# EAGLE board V4-AddOnSduino-V003 (EAGLE 9.3.0)
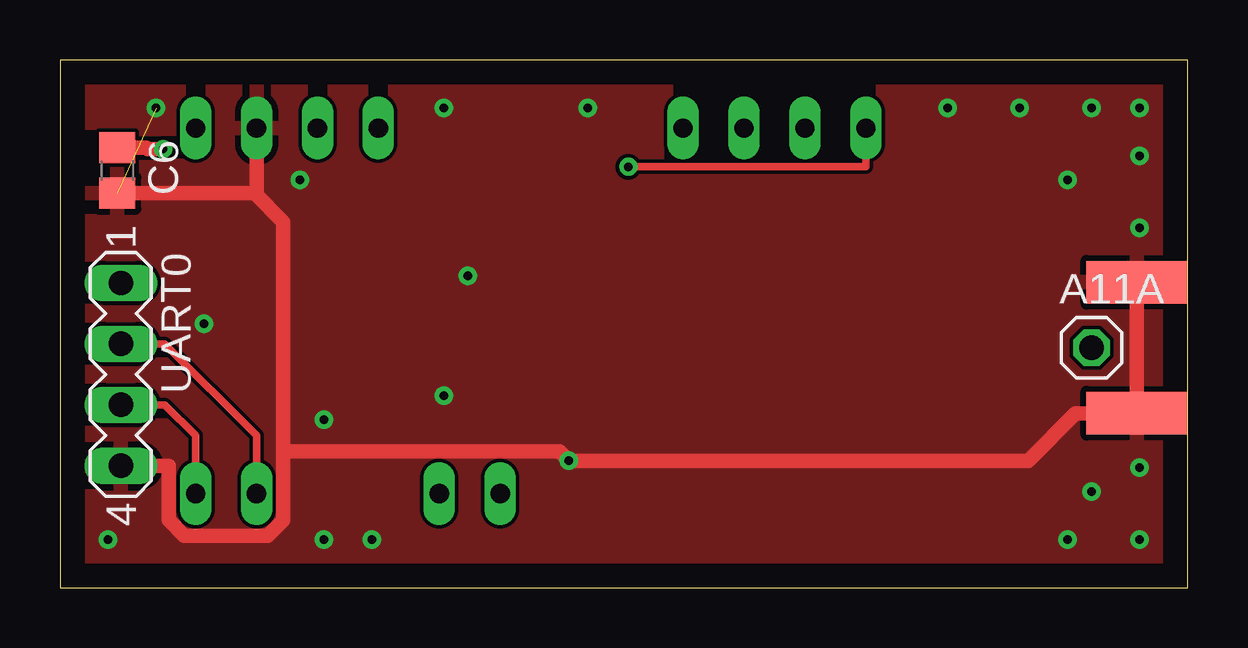
[diagram p0: board, top side]
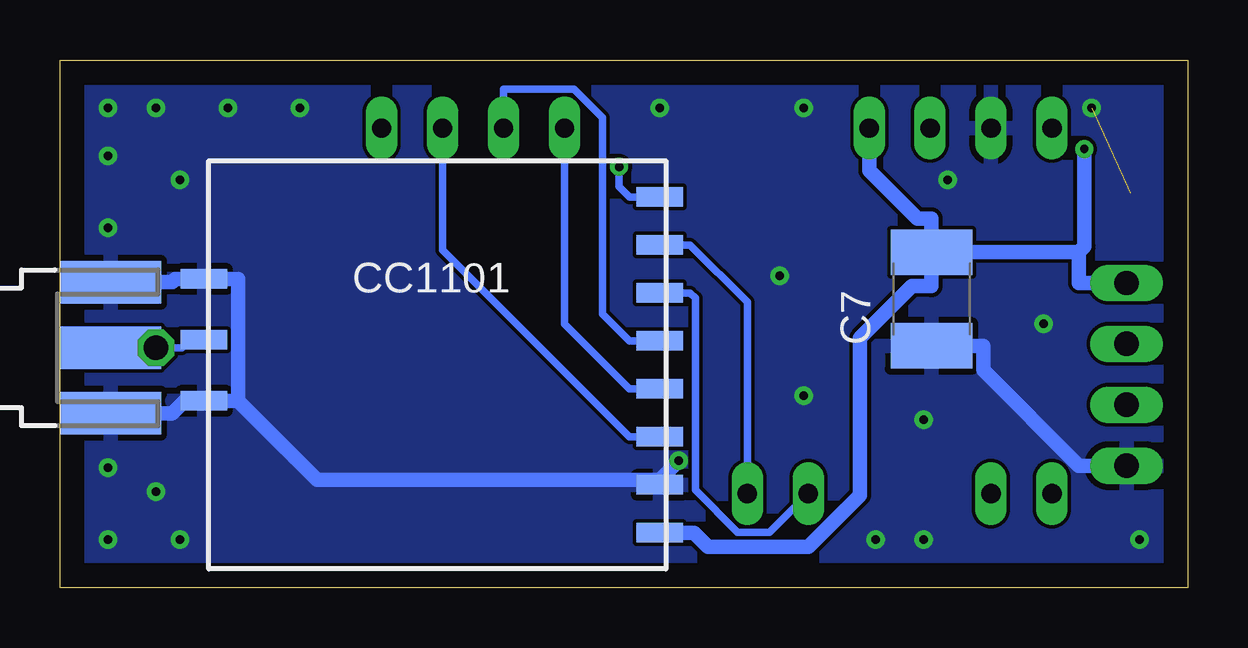
[diagram p1: board, bottom side, seen from below]

Size 47 x 22 mm. Coordinates in mm from the lower left corner, seen from the top.
Outline: 0,0 47,0 47,22 0,22 0,0
Copper layers (1*16): Top 0.035mm / dielectric 1.5mm / Bottom 0.035mm
Design rules "default": minimum track width 6mil, minimum drill 0.35mm, track to track 6mil, track to pad 6mil, pad to pad 6mil, via to via 6mil, smd to smd 6mil, copper to edge 40mil, drill to drill 6mil, minimum pad ring 10mil, minimum via ring 8mil, stop-mask expansion 4mil, vias tented up to drill 0mil, thermal gap 10mil
Net classes: 0 default: width 0.305 mm; 1 PWR: width 0.61 mm

## Footprints (pad centres in the part's own frame; a part is rotated, then mirrored left to right if it is on the bottom)
1X01 = drill 1.016 octagon: 1 0,0
SMA = smd 4.191 x 1.778: 1 2.115,0; GND@1 2.115,2.733; GND@2 2.115,-2.733 | smd 4.191 x 1.778 bottom: GND@3 2.115,2.733; GND@4 2.115,-2.733
C0805 = smd 1.3 x 1.5: 1 -0.95,0; 2 0.95,0
C1812 = smd 1.9 x 3.4: 1 -1.95,0; 2 1.95,0
CC1101_MODULE1_SMD = smd 1.93 x 0.813: ANT 19,5.96; CSN 0,0; GDO0 0,2; GDO2 0,4; GND@0 0,12; GND@1 19,8.5; GND@2 19,3.42; MISO 0,6; MOSI 0,10; SCLK 0,8; VCC 0,14
MARTIN-PRO-CC1101 = drill 0.8 long: D2 -5.08,-3.81; D3 -5.08,-6.35; D10 10.16,-21.59; D11 10.16,-19.05; D12 10.16,-16.51; D13 10.16,-13.97; GND 10.16,3.81; RAW 10.16,6.35; RST 10.16,1.27; RX1 -5.08,3.81; TX0 -5.08,6.35; VCC 10.16,-1.27
MA04-1 = drill 1.016 long: 1 -3.81,0; 2 -1.27,0; 3 1.27,0; 4 3.81,0

## Placement (x,y rotation side)
A11A  [1X01]  43,10 0 top
A11B  SMA  [SMA]  47,10 0 bottom
C6  22pF  [C0805]  2.4,17.39 270 top
C7  [C1812]  10.67,12.03 90 bottom
CC1101  CC1101_MODULE1SMD  [CC1101_MODULE1_SMD]  22,16.29 180 bottom
U$2  MARTIN-PROMINI-CC1101  [MARTIN-PRO-CC1101]  12,9 90 top
UART0  [MA04-1]  2.54,8.89 270 top

## Library data of the parts
A11A = pinhead
A11B = wireless
C6 C7 = rcl; SPICEPREFIX: C
CC1101 = CC1101
U$2 = Arduino-clone
UART0 = con-lstb; OC_FARNELL: unknown; OC_NEWARK: unknown

## Nets
ANT1: A11A.1 A11B.1 CC1101.ANT
CSN: CC1101.CSN U$2.D10
GDO0_D3: CC1101.GDO0 U$2.D3
GDO2_D2: CC1101.GDO2 U$2.D2
GND [PWR]: A11B.GND@1 A11B.GND@2 A11B.GND@3 A11B.GND@4 C6.2 C7.1 CC1101.GND@0 CC1101.GND@1 CC1101.GND@2 U$2.GND UART0.4
MISO: CC1101.MISO U$2.D12
MOSI: CC1101.MOSI U$2.D11
RX-MAPLE0: U$2.TX0 UART0.3
SCK: CC1101.SCLK U$2.D13
TX-MAPLE0: U$2.RX1 UART0.2
VCC [PWR]: C6.1 C7.2 CC1101.VCC U$2.VCC UART0.1

## Tracks (layer width: path | path; a pad name or v marks a point on that pad's centre or on a via)
ANT1
  Bottom 0.305: CC1101.ANT 41.6,10.33 41.93,10 A11A.1 A11B.1
CSN  (via drill 0.35 pad 0.76)
  Top 0.305: v23.7,17.55 33.59,17.55 U$2.D10
  Bottom 0.305: v23.7,17.55 23.7,16.72 23.27,16.29 CC1101.CSN
GDO0_D3
  Bottom 0.305: CC1101.GDO0 20.73,14.29 18.35,11.91 U$2.D3
GDO2_D2
  Bottom 0.305: U$2.D2 17.42,2.31 18.75,2.31 20.51,4.07 20.51,12.07 20.73,12.29 CC1101.GDO2
GND  (via drill 0.35 pad 0.76)  (1 unrouted)
  Top 0.61: 9.3,5.69 20.81,5.69 v21.21,5.29 40.35,5.29 42.33,7.27 A11B.GND@4 A11B.GND@3 | 9.3,5.69 9.3,15.25 8.11,16.45 | 9.3,5.69 9.3,2.8 8.65,2.15 5.18,2.15 4.52,2.82 4.52,5.08 UART0.4 | 8.11,16.45 8.19,16.53 U$2.GND | C6.2 8.11,16.45
  Bottom 0.61: 39.58,7.79 39.58,12.87 CC1101.GND@2 42.19,12.87 42.33,12.73 A11B.GND@3 | 22,4.5 v21.21,5.29 | CC1101.GND@0 22,4.5 | 22,4.5 36.29,4.5 39.58,7.79 | 39.58,7.79 CC1101.GND@1 41.81,7.79 42.33,7.27 A11B.GND@4 | C7.1 8.51,10.08 8.51,9.07 4.52,5.08 UART0.4
  other vias: 2,2 11,2 13,2 11,7 10,17 4,20 16,20 22,20 17,13 42,2 45,2 45,5 43,4 45,20 45,18 45,15 43,20 40,20 37,20 42,17 16,8 6,11
  pour Bottom: 1,21 1,1 46,1 46,21
  pour Top: 1,21 46,21 46,1 1,1
MISO
  Bottom 0.305: CC1101.MISO 23.27,10.29 24.39,11.41 24.39,19.59 25.57,20.77 28.51,20.77 U$2.D12
MOSI
  Bottom 0.305: CC1101.MOSI 23.27,6.29 31.05,14.07 U$2.D11
RX-MAPLE0
  Top 0.305: UART0.3 4.37,7.62 5.65,6.34 U$2.TX0
SCK
  Bottom 0.305: CC1101.SCLK 23.27,8.29 25.97,10.99 U$2.D13
TX-MAPLE0
  Top 0.305: UART0.2 4.37,10.16 8.19,6.34 U$2.RX1
VCC  (via drill 0.35 pad 0.76)
  Top 0.61: C6.1 3.6,18.34 3.66,18.29 v4.3,18.29
  Bottom 0.61: CC1101.VCC 20.58,2.29 19.98,1.69 15.81,1.69 13.65,3.85 13.65,10.4 11.48,12.57 10.67,12.57 C7.2 | 4.54,13.98 C7.2 | 4.54,13.98 4.3,14.22 v4.3,18.29 | 4.54,13.98 4.52,13.96 4.52,12.7 UART0.1 | C7.2 10.67,15.39 11.26,15.39 13.27,17.39 U$2.VCC